# Altium PCB 2016_CARTE_MOFSET.PCBDOC
Units mil, origin at the board's own origin, x right, y up, seen from the top; angles counter-clockwise.
Board outline 2598.44 x 2322.82 mil, 4 copper layers (1-TOP, 2-SIGNAL, 3-GND, 4-BOTTOM); 62 components, 43 nets, 170 pads, 533 vias.
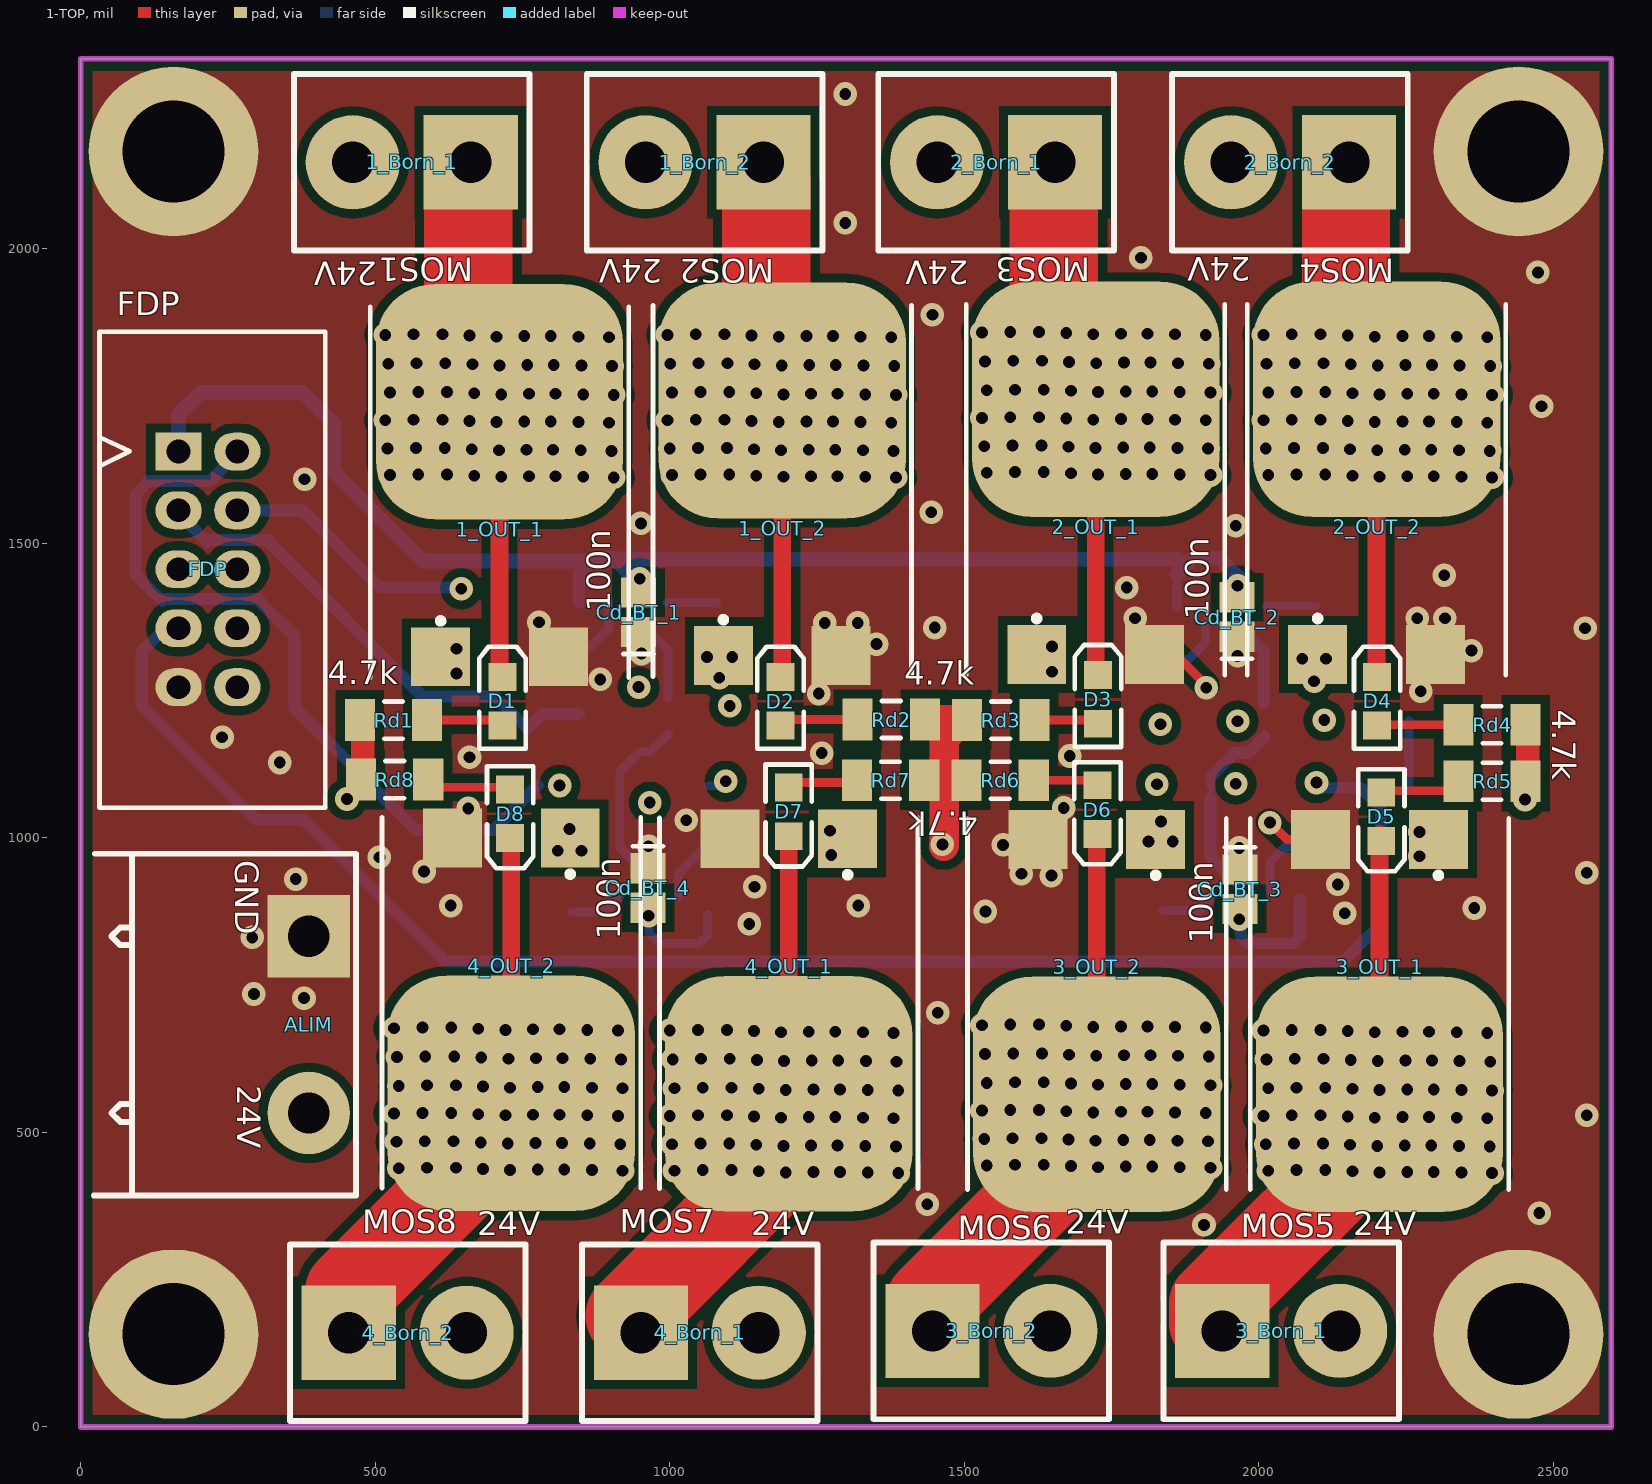
[diagram p0: 1-TOP view]
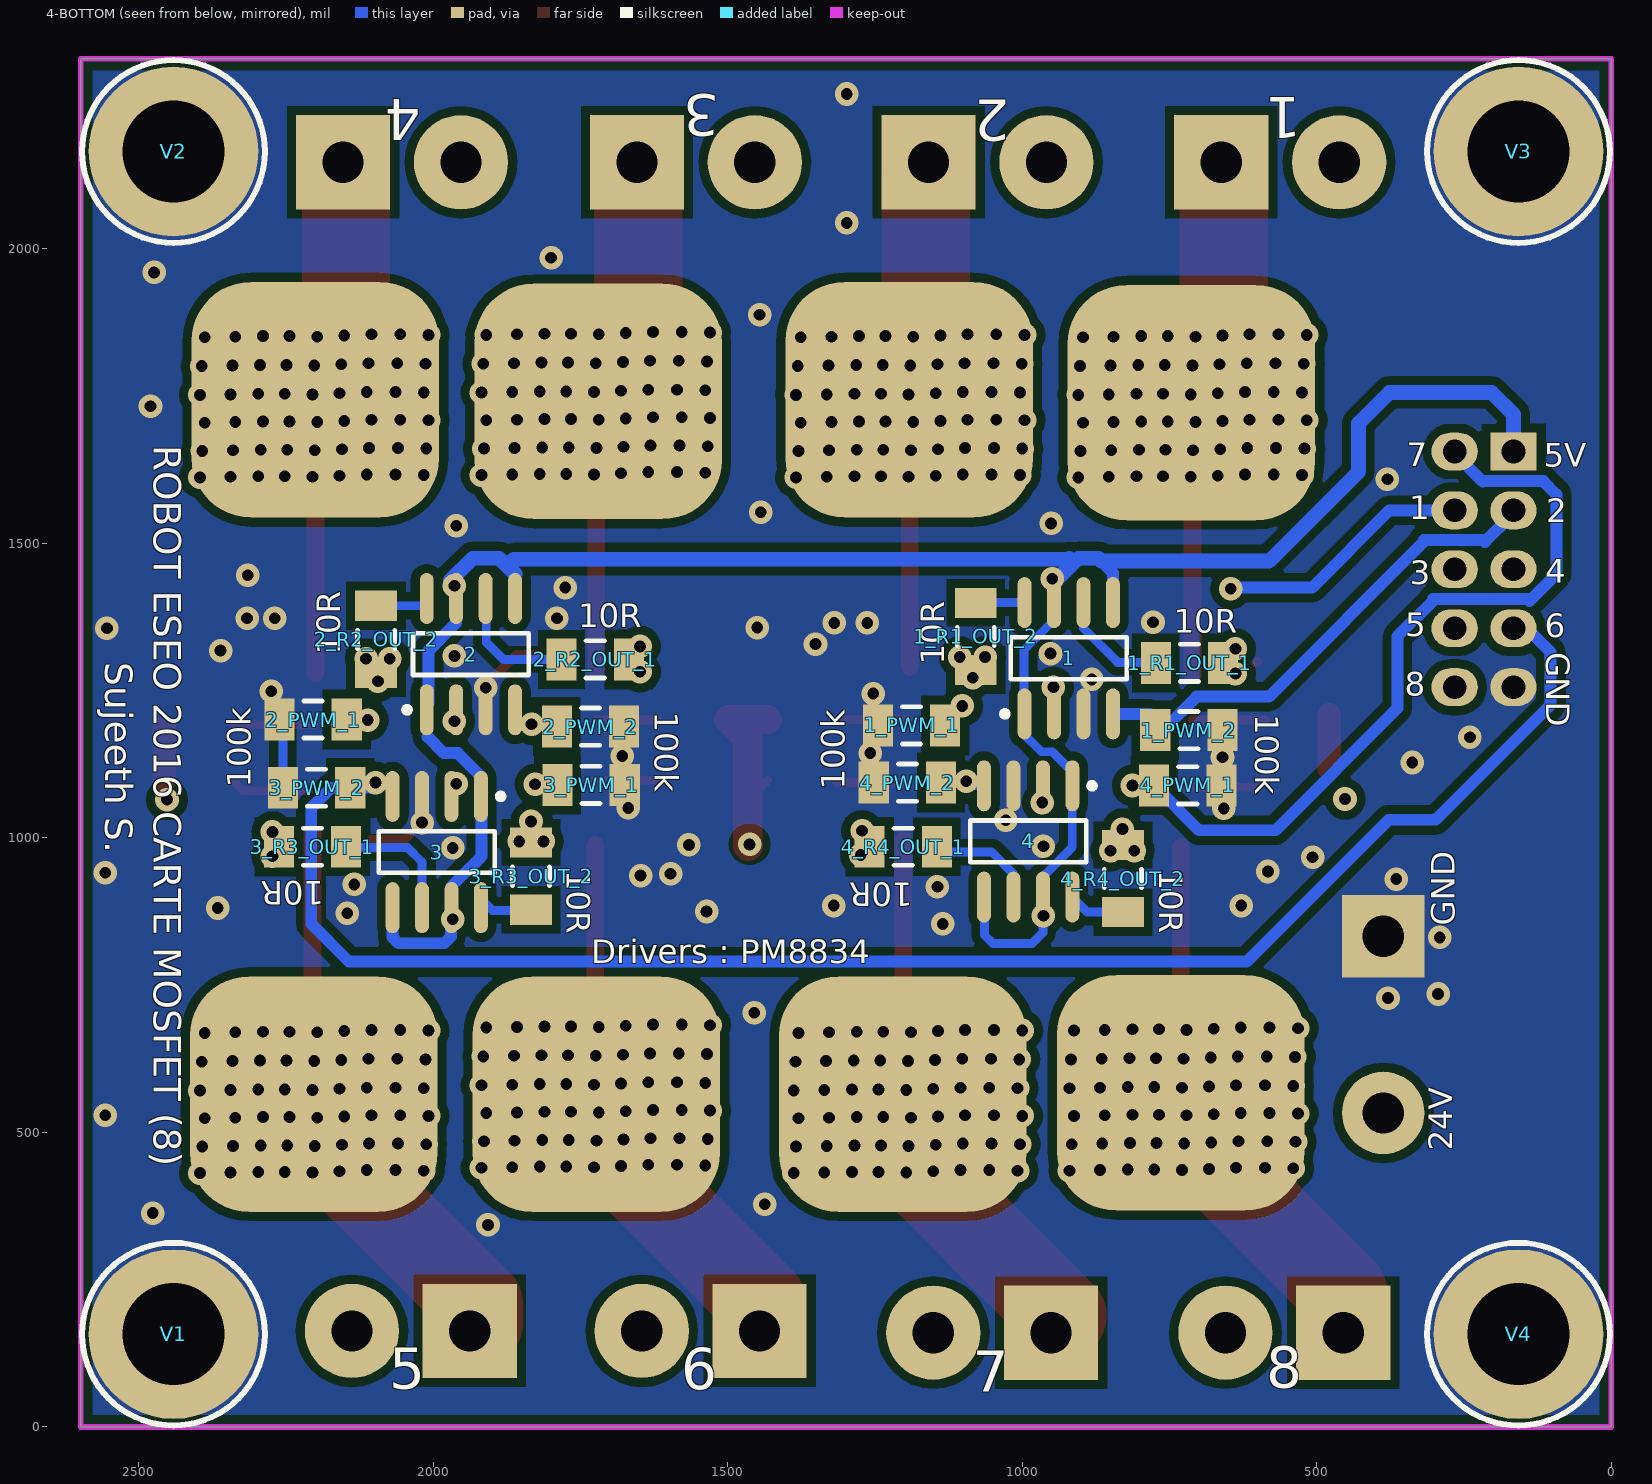
[diagram p1: 4-BOTTOM view, seen from below]
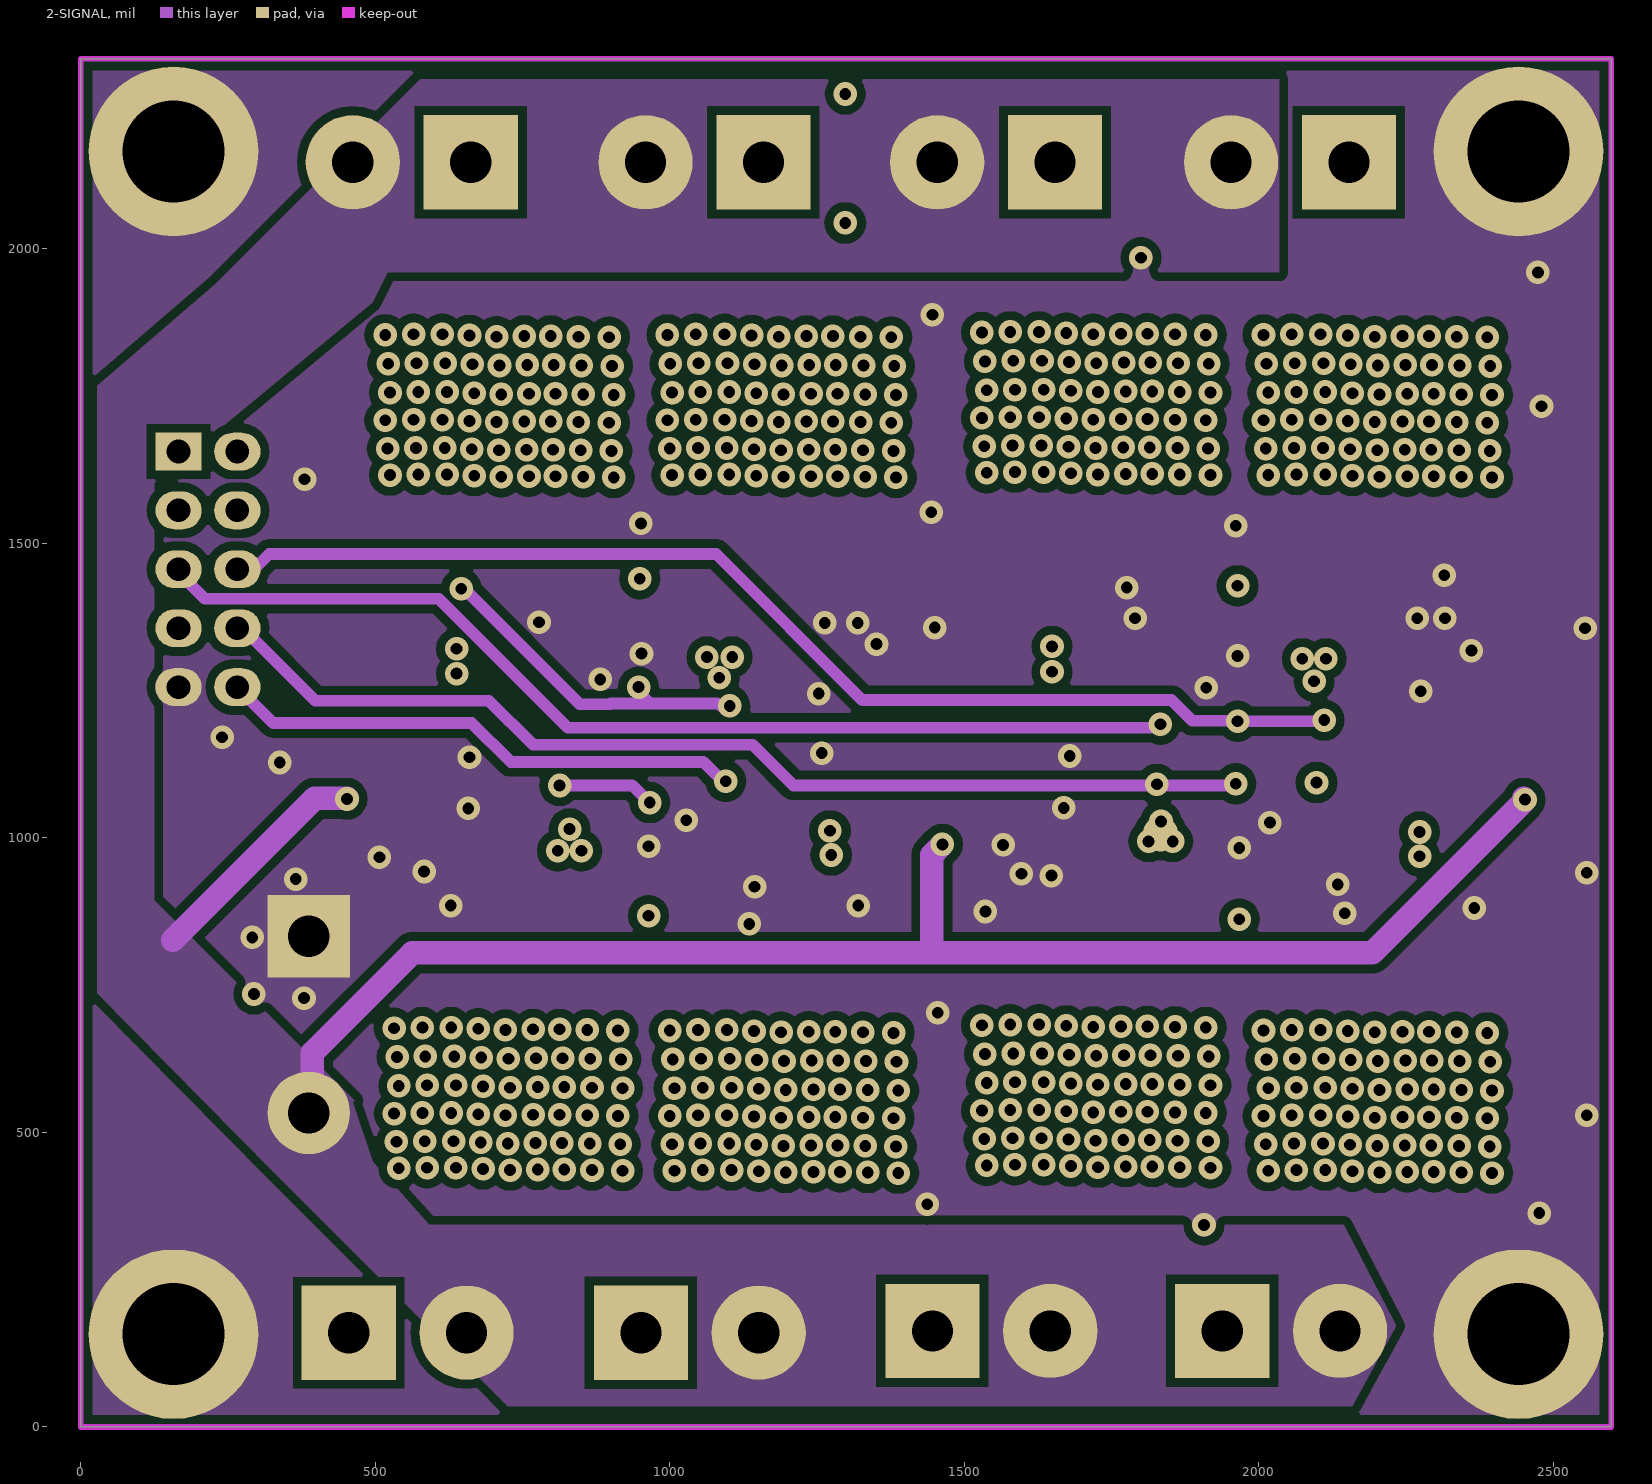
[diagram p2: 2-SIGNAL]
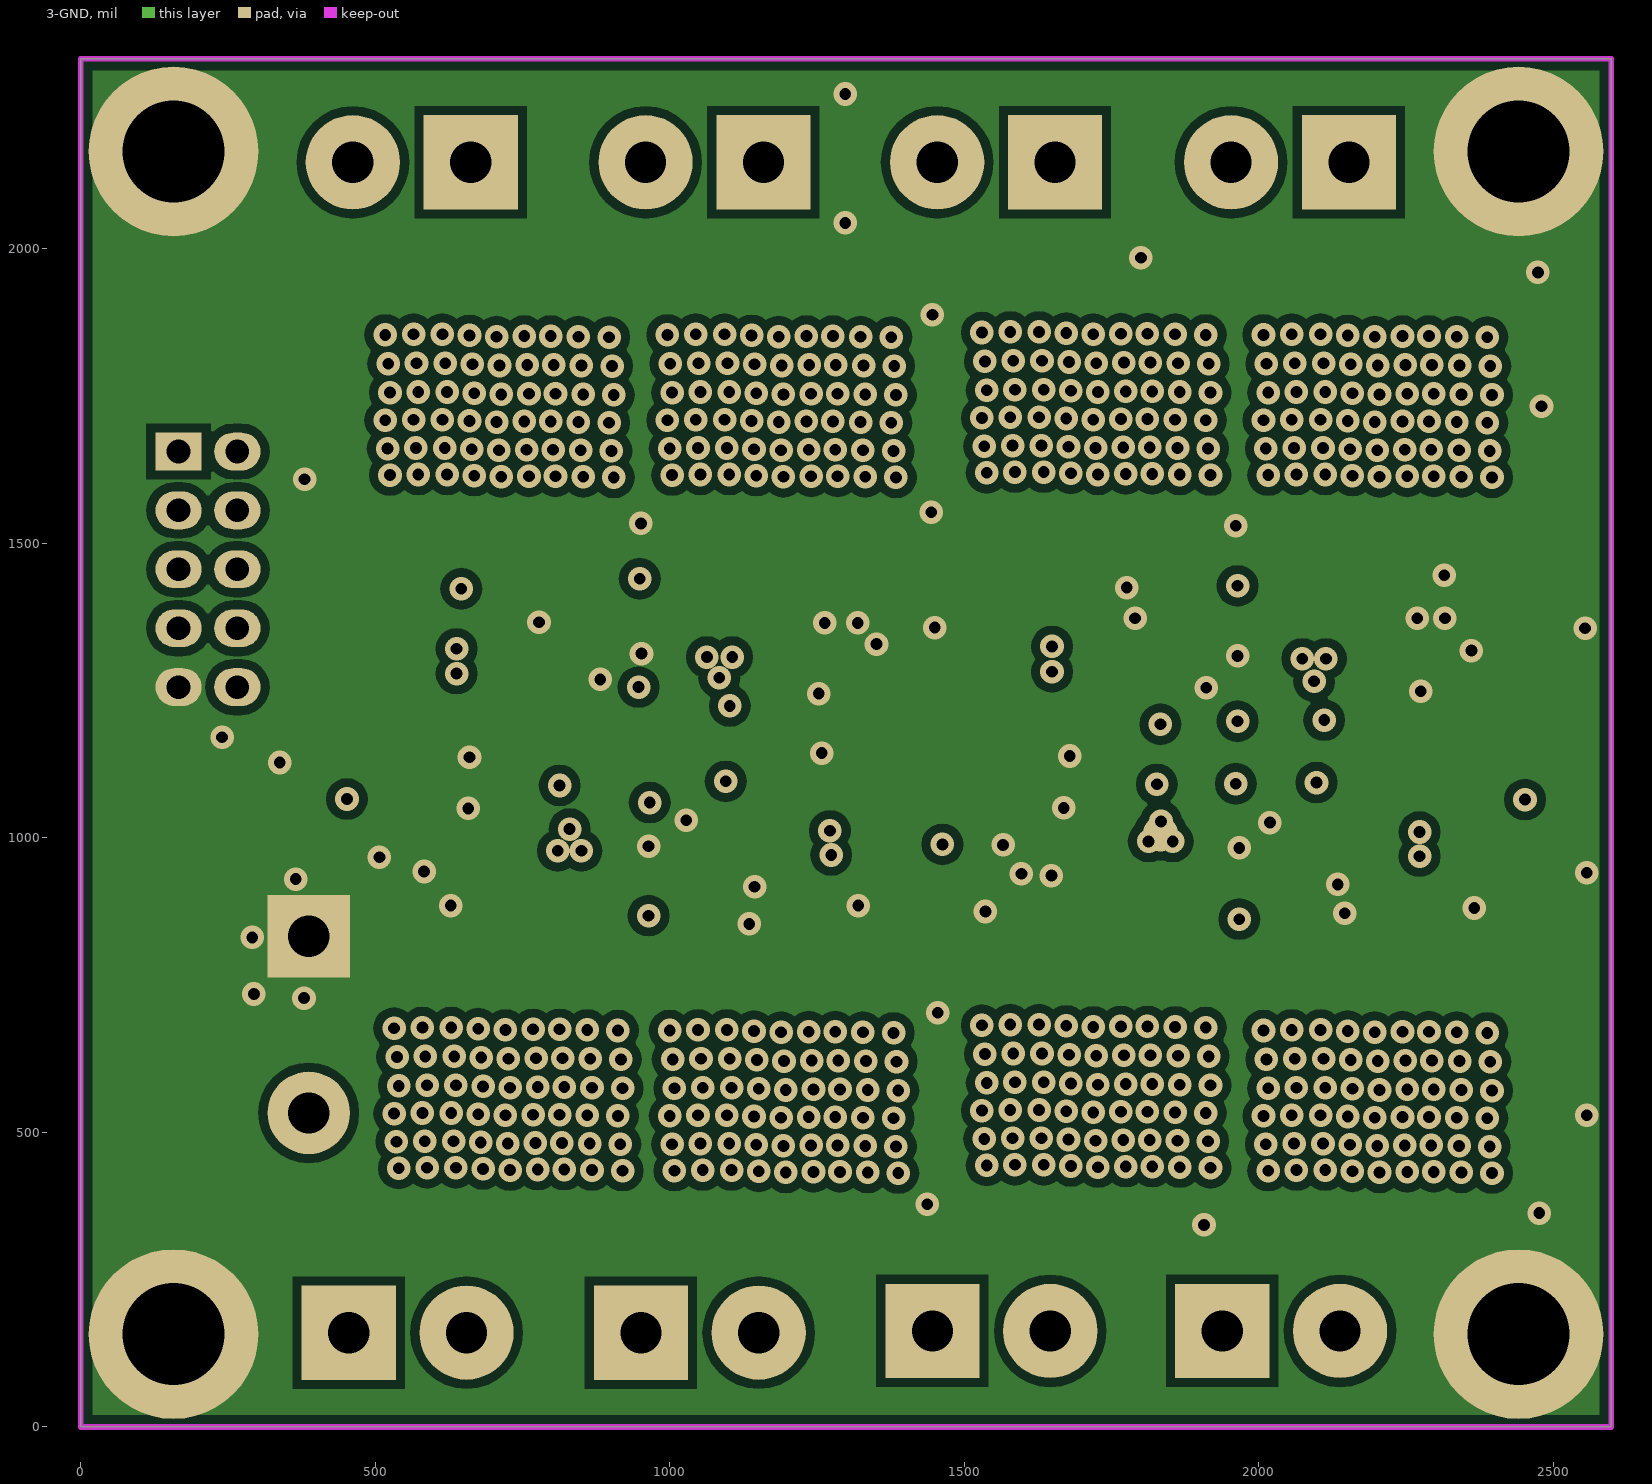
[diagram p3: 3-GND]
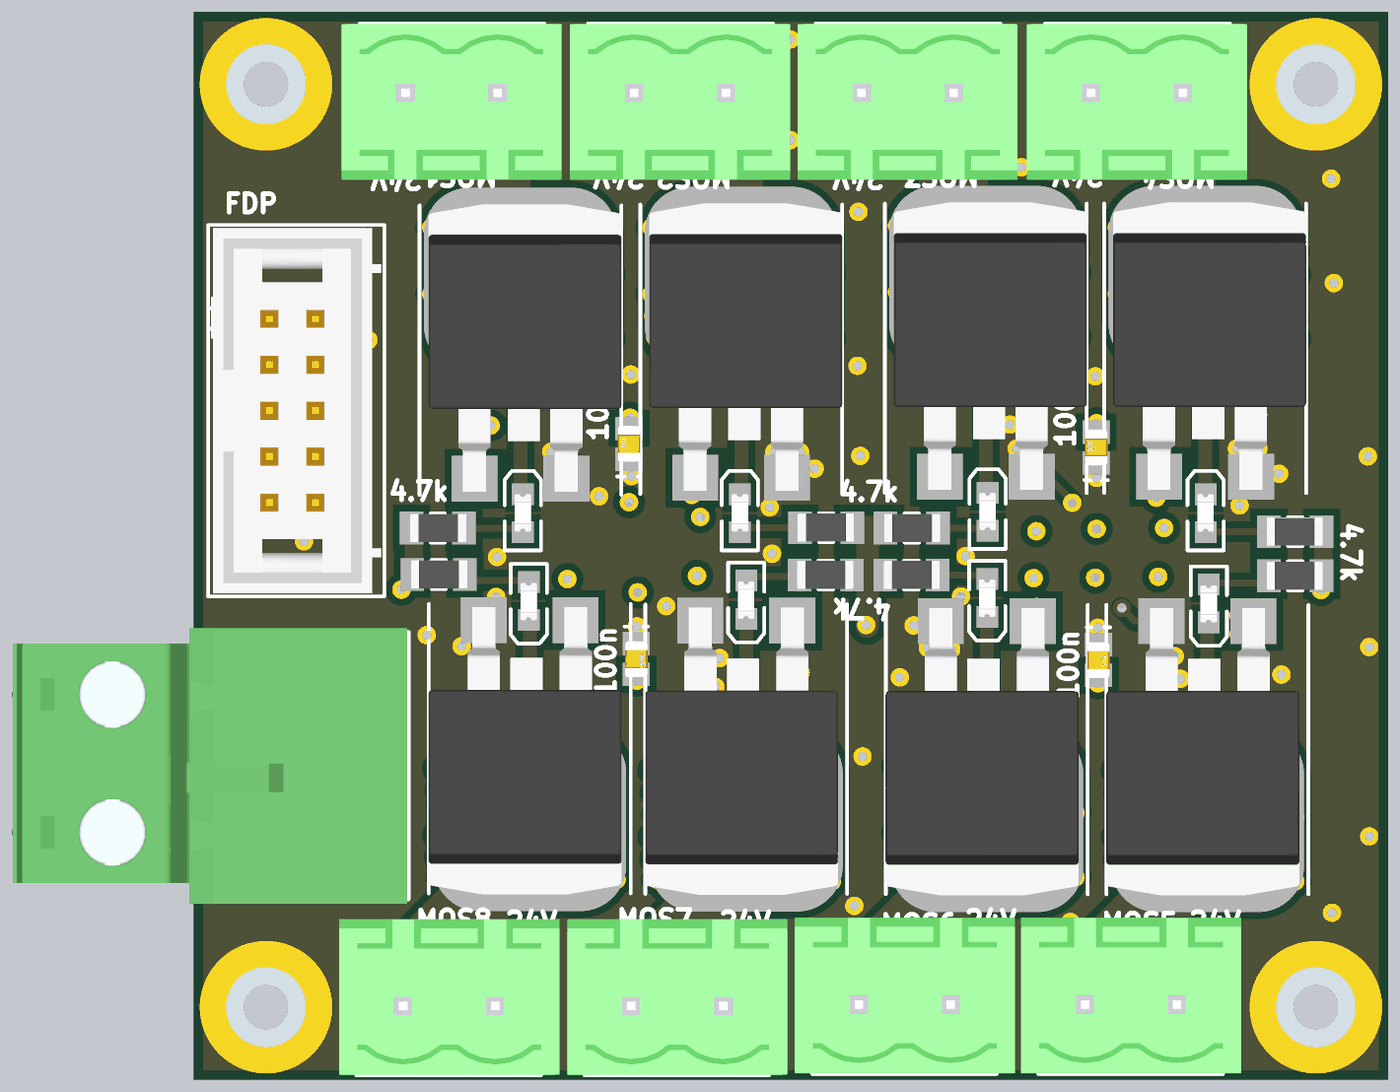
[diagram p4: 3D render of the assembled board from above, using the file's embedded part models]
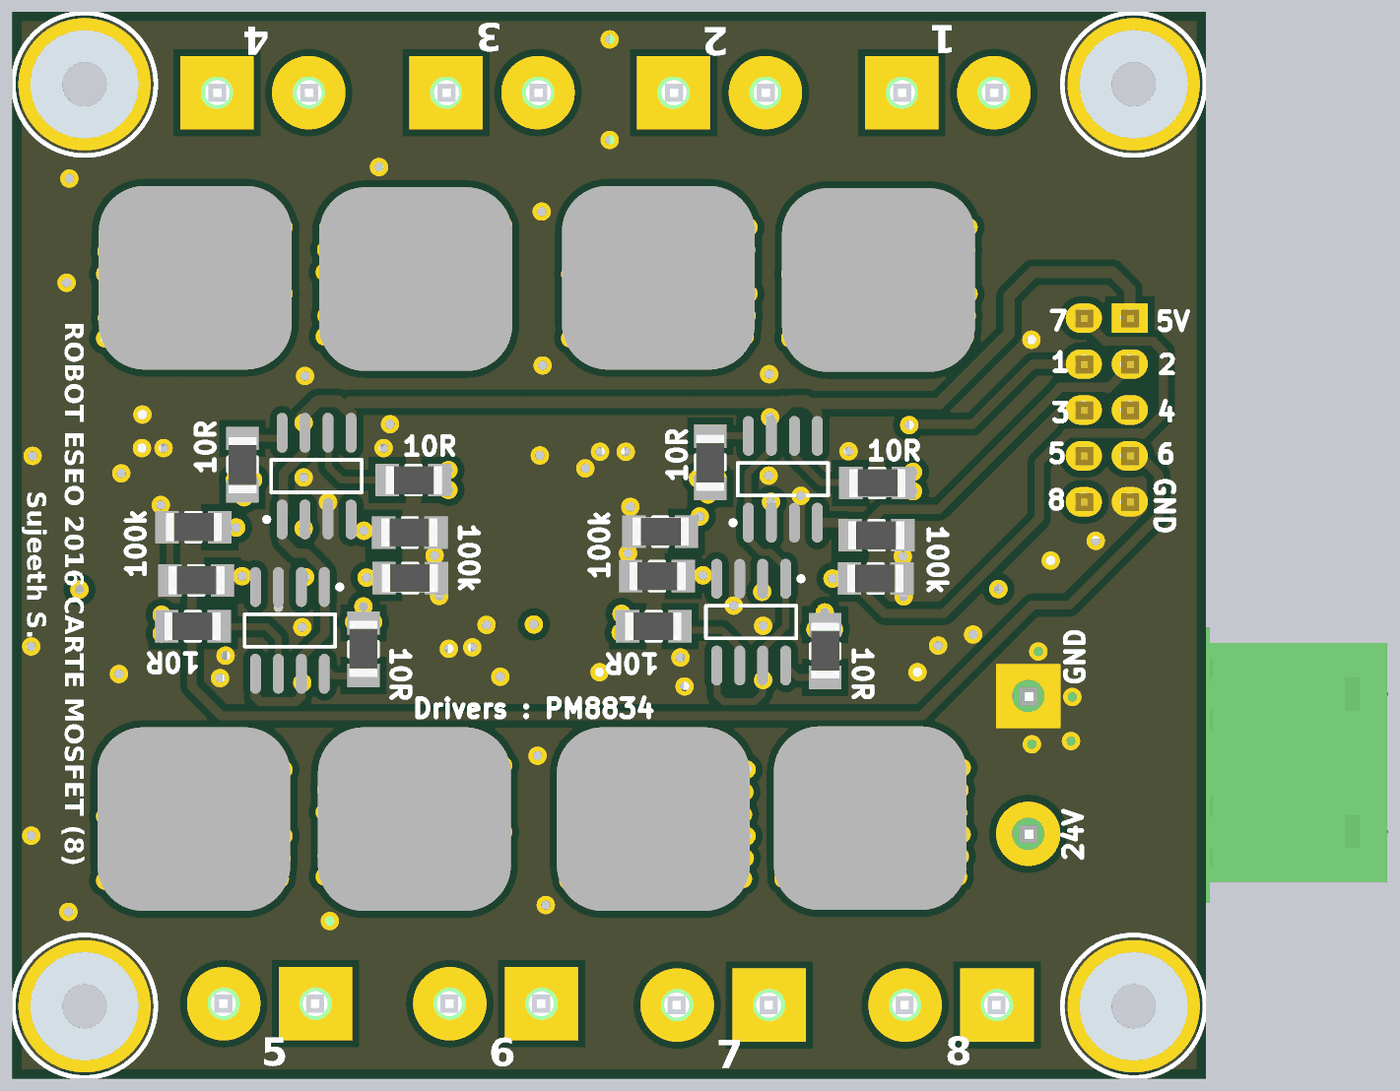
[diagram p5: 3D render of the assembled board from below, using the file's embedded part models]

## Layer stack, top to bottom
Top Solder: solder mask 0.4, Solder Resist, Dk 3.5
1-TOP: signal copper 1.4
Dielectric1: prepreg 12.6, FR-4, Dk 4.8
2-SIGNAL: signal copper 1.4
Dielectric2: core 12.6, FR-4, Dk 4.8
3-GND: signal copper 1.4
Dielectric3: prepreg 12.6, FR-4, Dk 4.8
4-BOTTOM: signal copper 1.4
Bottom Solder: solder mask 0.4, Solder Resist, Dk 3.5

## Board outline
-0.02,0.02 2598.43,0.02 2598.43,2322.83 -0.02,2322.83

## Design rules (kind name [scope] priority, off if disabled: settings)
Clearance Clearance_1 [InNamedPolygon('4-BOTTOM') Or  InNamedPolygon('2-SIGNAL') Or  InNamedPolygon('2-24V') Or  InNamedPolygon('3-TOP') Or  InNamedPolygon('3-GND')] p1: gap=15
Clearance [All] p2: gap=7
FabricationTestPointUsage TestPointUsage [All] p1: valid=0 allowmultiple=FALSE
FabricationTestpoint Testpoint [All] p1: side=3 testpointundercomponent=TRUE minsize=40 maxsize=100 preferedsize=60 minholesize=0 maxholesize=40 preferedholesize=32 testpointgrid=1 allowsidetop=TRUE allowsidebottom=TRUE usegrid=TRUE gridtolerance=0.01
PlaneClearance [All] p1: clearance=10
PlaneConnect [All] p1: planeconnectstyle=Direct reliefexpansion=25 reliefentries=4 reliefconductorwidth=12 reliefairgap=15
PolygonConnect [All] p1: connectstyle=Direct reliefconductorwidth=10 reliefentries=4 polygonreliefangle="90 Angle" airgapwidth=10
RoomDefinition 2016_CARTE_MOFSET [InComponentClass('2016_CARTE_MOFSET')] p1: confinementstyle=ConfineIn formatcopy=TRUE lockcomponents=FALSE outline 5560.14,3155.02 6797.14,3155.02 6797.14,3535.02 5560.14,3535.02
RoutingLayers RoutingLayers_1 [All] p1: top layer_v5=TRUE mid layer 1_v5=FALSE mid layer 2_v5=FALSE bottom layer_v5=TRUE
RoutingLayers [All] p2: top layer_v5=TRUE mid layer 1_v5=FALSE mid layer 2_v5=FALSE bottom layer_v5=TRUE
RoutingVias [All] p1: holewidth=28 width=50 viastyle="Through Hole" minholewidth=28 minwidth=50 maxholewidth=28 maxwidth=50
SilkToSolderMaskClearance SilkscreenOverComponentPads [IsPad] p1: minsilkscreentomaskgap=10 clearancetoexposedcopper=TRUE
SolderMaskExpansion [All] p1: expansion=0
Width [All] p1: maxlimit=300 minlimit=5 preferedwidth=20
23 further rules are at their usual default settings.

## Components (designator, comment, footprint, x,y, rotation, side; value= is the part's Value field where it differs from the comment)
1 "PM8834-1" SO8_N 920.98,1305.02 r90 bottom
1_Born_1 "BORNIER2" BORNIER2 461.98,2147.02 r0 top
1_Born_2 "BORNIER2" BORNIER2 958.98,2147.02 r0 top
1_OUT_1 "AUIRF1018ES" D2PAK_GROS_PAD 710.98,1524.02 r0 top
1_OUT_2 "AUIRF1018ES" D2PAK_GROS_PAD 1190.98,1526.02 r0 top
1_PWM_1 "100k_1%_75V" R1206_N 1187.98,1191.02 r180 bottom
1_PWM_2 "100k_1%_75V" R1206_N 716.98,1183.02 r0 bottom
1_R1_OUT_1 "10" R1206_N 715.98,1297.02 r180 bottom
1_R1_OUT_2 "10" R1206_N 1078.98,1342.02 r270 bottom
2 "PM8834-2" SO8_N 1935.98,1312.02 r90 bottom
2_Born_1 "BORNIER2" BORNIER2 1453.98,2147.02 r0 top
2_Born_2 "BORNIER2" BORNIER2 1952.98,2147.02 r0 top
2_OUT_1 "AUIRF1018ES" D2PAK_GROS_PAD 1722.98,1528.02 r0 top
2_OUT_2 "AUIRF1018ES" D2PAK_GROS_PAD 2199.98,1528.02 r0 top
2_PWM_1 "100k_1%_75V" R1206_N 2203.98,1201.02 r180 bottom
2_PWM_2 "100k_1%_75V" R1206_N 1732.98,1189.02 r0 bottom
2_R2_OUT_1 "10" R1206_N 1724.98,1303.02 r180 bottom
2_R2_OUT_2 "10" R1206_N 2096.98,1337.02 r270 bottom
3 "PM8834-3" SO8_N 1993.98,976.02 r270 bottom
3_Born_1 "BORNIER2" BORNIER2 2137.98,163.02 r180 top
3_Born_2 "BORNIER2" BORNIER2 1645.98,163.02 r180 top
3_OUT_1 "AUIRF1018ES" D2PAK_GROS_PAD 2204.98,781.02 r180 top
3_OUT_2 "AUIRF1018ES" D2PAK_GROS_PAD 1724.98,781.02 r180 top
3_PWM_1 "100k_1%_75V" R1206_N 1731.98,1090.02 r0 bottom
3_PWM_2 "100k_1%_75V" R1206_N 2197.98,1085.02 r180 bottom
3_R3_OUT_1 "10" R1206_N 2204.98,985.02 r0 bottom
3_R3_OUT_2 "10" R1206_N 1833.98,935.02 r90 bottom
4 "PM8834-4" SO8_N 989.98,994.02 r270 bottom
4_Born_1 "BORNIER2" BORNIER2 1150.98,160.02 r180 top
4_Born_2 "BORNIER2" BORNIER2 654.98,160.02 r180 top
4_OUT_1 "AUIRF1018ES" D2PAK_GROS_PAD 1201.98,782.02 r180 top
4_OUT_2 "AUIRF1018ES" D2PAK_GROS_PAD 730.98,783.02 r180 top
4_PWM_1 "100k_1%_75V" R1206_N 718.98,1089.02 r0 bottom
4_PWM_2 "100k_1%_75V" R1206_N 1194.98,1094.02 r180 bottom
4_R4_OUT_1 "10" R1206_N 1201.98,985.02 r0 bottom
4_R4_OUT_2 "10" R1206_N 828.98,931.02 r90 bottom
ALIM "0 - 24V" BORNIER2_FEM_COUDE 386.98,833.02 r270 top
Cd_BT_1 "100nF" C0805_N 946.98,1383.02 r90 top
Cd_BT_2 "100nF" C0805_N 1962.98,1375.02 r90 top
Cd_BT_3 "100nF" C0805_N 1967.98,913.02 r270 top
Cd_BT_4 "100nF" C0805_N 962.98,915.02 r270 top
D1 "LED" LED_0805 715.98,1232.02 r90 top
D2 "LED" LED_0805 1187.98,1232.02 r90 top
D3 "LED" LED_0805 1726.98,1235.02 r90 top
D4 "LED" LED_0805 2200.98,1232.02 r90 top
D5 "LED" LED_0805 2207.98,1036.02 r270 top
D6 "LED" LED_0805 1725.98,1048.02 r270 top
D7 "LED" LED_0805 1201.98,1044.02 r270 top
D8 "LED" LED_0805 728.98,1041.02 r270 top
FDP "HE10/10_MALE_DROIT_BAS_PROFIL" HE10/10_M_D_BP 266,1656 r270 top
Rd1 "4,7k" R1206_N 530.98,1200.02 r0 top
Rd2 "4,7k" R1206_N 1375.98,1201.02 r180 top
Rd3 "4,7k" R1206_N 1561.98,1200.02 r0 top
Rd4 "4,7k" R1206_N 2395.98,1192.02 r180 top
Rd5 "4,7k" R1206_N 2395.98,1096.02 r180 top
Rd6 "4,7k" R1206_N 1560.98,1098.02 r0 top
Rd7 "4,7k" R1206_N 1374.98,1098.02 r180 top
Rd8 "4,7k" R1206_N 532.98,1099.02 r0 top
V1 "Entretoise WURTH CMS" ENTRETOISE_CMS 2440.94,157.48 r180 bottom
V2 "Entretoise WURTH CMS" ENTRETOISE_CMS 2440.94,2165.35 r180 bottom
V3 "Entretoise WURTH CMS" ENTRETOISE_CMS 157.48,2165.35 r180 bottom
V4 "Entretoise WURTH CMS" ENTRETOISE_CMS 157.48,157.48 r180 bottom

## Footprints (in the part's own frame and the unit in brackets; to place one, negate y for a bottom-side part, rotate by r counter-clockwise, add the part's x,y. Pads: shape width x height; smd on the part's side, far side on the other; paste and mask are expansions set on the pad)
BORNIER2 [mil] "Connector; Header; 2 Position; screw terminal blocks, Pin Spacing=5.08mm"
  rect 160x160 hole 70: 1(200,0)
  round 160 hole 70: 2(0,0)
  silkscreen extent -100,-150 300,150, body extent -140,-189 338,150, height 472
BORNIER2_FEM_COUDE [mil] "Connector; Header; 2 Position; Right Angle; Female; Pin Spacing=5.08mm Green"
  rect 140x140 hole 70: 1(0,0)
  round 140 hole 70: 2(300,0)
  silkscreen extent -140,-365 440,80, body extent -149,-783 451,77, height 598
C0805_N [mm] "Chip Capacitor, Body 2.0x1.3mm, IPC Medium Density"
  rect 1.3x1.5 smd: 1(-0.85,0) 2(0.85,0)
  silkscreen extent -1.8,-0.65 -1.8,0.65, body extent -0.99,-0.63 1.01,0.63, height 0.8
D2PAK_GROS_PAD [mm] "D2-PAK/TO-263-AB; 3 Leads (1 Cropped); Body 15.5 (inc. leads) x 10.5 mm (LxW max)"
  rect 2.54x2.54 smd: 1(-2.54,-5.5) 3(2.54,-5.5)
  rrect50% 10.668x10.16 smd: 2(0,5.5)
  silkscreen extent -5.58,-6.4 5.58,9.6, body extent -5.08,-6.22 5.59,9.66, height 4.83
ENTRETOISE_CMS [mil] "Entretoise CMS Wurth trou 4.4mm"
  round 288 hole 173.23: 1(0,0)
  silkscreen extent -155,-155 155,155, body extent -118,-118 118,117, height 118
HE10/10_M_D_BP [mm] "HE10 ; 10 CONTACTS ; MALE ;  DROIT; BAS PROFIL ; ESPACEMENTS BROCHES = 2.54 mm"
  rect 1.63x2 hole 1.016: 1(0,-2.54)
  oval 1.63x2 hole 1.016: 2(0,0) 3(2.54,-2.54) 4(2.54,0) 5(5.08,-2.54) 6(5.08,0) 7(7.62,-2.54) 8(7.62,0) 9(10.16,-2.54) 10(10.16,0)
  silkscreen extent -5.16,-5.95 15.36,3.78, body extent -5,-5.8 15.2,3.6, height 8.8
LED_0805 [mm] "SM LED; 2 Flat Leads"
  rect 1.2x1.2 smd: 1(-1.05,0) 2(1.05,0)
  silkscreen extent -2.05,-1 2.35,1, body extent -1.05,-0.64 1.06,0.64, height 1.2
R1206_N [mm] "Chip Resistor, Body 3.2x1.6mm, IPC Medium Density"
  rect 1.3x1.8 smd: 1(-1.45,0) 2(1.45,0)
  silkscreen extent -0.4,-0.8 0.4,0.8, body extent -1.68,-0.87 1.68,0.87, height 0.71
SO8_N [mm] "SOIC, 8-Leads, Body 4.9x3.9mm, Pitch 1.27mm, IPC Medium Density"
  oval 2.2x0.6 smd: 1(-2.4,1.905) 2(-2.4,0.635) 3(-2.4,-0.635) 4(-2.4,-1.905) 5(2.4,-1.905) 6(2.4,-0.635) 7(2.4,0.635) 8(2.4,1.905)
  silkscreen extent -2.52,-2.5 0.9,2.88, body extent -1.95,-2.45 1.95,2.45, height 1.75

## Part data
1 2 3 4: library part PM8834, "4 A dual low-side MOSFET driver"
1_Born_1 1_Born_2 2_Born_1 2_Born_2 3_Born_1 3_Born_2 4_Born_1 4_Born_2: "Terminal blocks, 2 pins, pitch=5mm"
1_OUT_1 1_OUT_2 2_OUT_1 2_OUT_2 3_OUT_1 3_OUT_2 4_OUT_1 4_OUT_2: library part IRF1010S, "HEXFET N-Channel Power MOSFET"
1_PWM_1 1_PWM_2 1_R1_OUT_1 1_R1_OUT_2 2_PWM_1 2_PWM_2 2_R2_OUT_1 2_R2_OUT_2 3_PWM_1 3_PWM_2 3_R3_OUT_1 3_R3_OUT_2 4_PWM_1 4_PWM_2 4_R4_OUT_1 4_R4_OUT_2 Rd1 Rd2 Rd3 Rd4 Rd5 Rd6 Rd7 Rd8: library part Resistor, "Resistor"
ALIM: library part BORNIER2, "Terminal blocks, 2 pins, pitch=5mm"
Cd_BT_1 Cd_BT_2 Cd_BT_3 Cd_BT_4: library part Condensateur, "Capacitor"
D1 D2 D3 D4 D5 D6 D7 D8: "Typical LED"
FDP: "EMBASE HE10/10 MALE DROIT BAS PROFIL"
V1 V2 V3 V4: "Entretoise Wurth"

## Free pads (board coordinates)
  round 60 on Mid1: 0(1833,1007)
  round 60 on Mid2: 0(1833,1007)
  rrect50% 420x400 smd far side: 2(712.98,1739.02) 2(730.98,567.02) 2(1191.98,1744.02) 2(1202.98,565.02) 2(1719.98,1741.02) 2(1722.98,565.02) 2(2199.98,1744.02) 2(2202.98,565.02)

## Via types
v1: diameter 40, hole 20, 1-TOP to 4-BOTTOM, 533 vias

## Nets (pads, with @x,y where several pads share a name; then routed paths per layer and width w, separated by ;. In a path a pad name is that pad's centre, name@x,y a point inside that pad or via, vN(x,y) a via of type N, cw(c..) or ccw(c..) an arc to the next point about the centre after c; other vN are vias at no path point)
5V: 1.1 1.5 1.7 2.1 2.5 2.7 3.1 3.5 3.7 4.1 4.5 4.7 Cd_BT_1.2 Cd_BT_2.2 Cd_BT_3.2 Cd_BT_4.2 FDP.1 | length 3713
  4-BOTTOM w15: FDP.1@165.98,1654.02 FDP.1 ; 904.98,1475.02 919.98,1475.02 ; 1.7 945.98,1370.02 996.98,1319.02 1.1@996.98,1238.02 ; 4.7@962.98,936.02 914.98,984.02 4.1 914.98,1112.02 949.28,1146.31 967.28,1146.31 1.1@997.98,1177.02 ; 4.7 964.98,839.02 982.98,821.02 1049.98,821.02 1063.98,835.02 4.5@1063.98,870.02 ; 2.5@1860.98,1391.5 2.5@1860.98,1448.02 ; 3.1@1918.98,1085.5 3.1@1918.98,1105.02 ; 2.7@1960.98,1365.02 2.7@1960.98,1391.5 ; 3.7@1968.98,896.53 3.7@1968.98,918.02
  4-BOTTOM w20: 1.5 845.98,1450.02 865.98,1470.02 865.98,1471.02 869.98,1475.02 ; 3.1@1917.98,1069.02 1917.98,969.02 3.7@1968.98,918.02 ; 3.1@1918.98,1105.02 1957.98,1144.02 1981.98,1144.02 2009.48,1171.52 ; 2.7@1960.98,1365.02 2007.98,1318.02 2.1@2007.98,1229.02 ; 3.7@1969.98,885.02 1969.98,832.02 1980.98,821.02 2058.98,821.02 2068.98,831.02 3.5@2068.98,896.53
  4-BOTTOM w25: FDP.1 165.98,1719.02 202.98,1756.02 376.98,1756.02 428.98,1704.02 428.98,1622.02 580.98,1470.02 865.98,1470.02 ; 869.98,1475.02 904.98,1475.02 v1@934.48,1445.52 ; 919.98,1475.02 921.98,1473.02 1862.98,1473.02 1874.48,1461.52 ; 2.5@1860.98,1448.02 1887.98,1475.02 1932.98,1475.02 2.7@1970.98,1437.02
  other v1: 1966.98,862.02 963.98,868.02 1963.98,1428.02 948.98,1440.02
24V: 1_Born_1.2 1_Born_2.2 2_Born_1.2 2_Born_2.2 3_Born_1.2 3_Born_2.2 4_Born_1.2 4_Born_2.2 ALIM.2 Rd1.1 Rd2.1 Rd3.1 Rd4.1 Rd5.1 Rd6.1 Rd7.1 Rd8.1 | length 3402.2
  1-TOP w15: Rd8.1@478.98,1118.02 Rd8.1@483.98,1113.02 ; Rd7.1 Rd7.1@1439.07,1091.02 ; Rd7.1@1438.98,1091.02 Rd7.1@1443.98,1086.02 ; Rd4.1 Rd4.1@2456.98,1188.1
  1-TOP w40: Rd8.1@478.98,1118.02 Rd1.1@478.98,1209.02 ; Rd5.1@2456.98,1098.02 Rd4.1@2456.98,1188.1
  1-TOP w50: Rd2.1 1497.98,1201.02 1465.98,1169.02 1465.98,987.02 v1@1464.98,986.02
  2-SIGNAL w40: 155.98,826.02 396.98,1067.02 v1@451.98,1067.02 ; ALIM.2@392.98,559.02 392.98,635.02 562.98,805.02 1444.98,805.02 ; v1@1459.98,986.02 1444.98,971.02 1444.98,805.02 ; v1@2449.98,1067.02 2449.98,1062.02 2192.98,805.02 1444.98,805.02
  other v1: 1462.98,989.02 2451.98,1065.02 451.98,1066.02
GND: 1.3 1_OUT_1.3 1_OUT_2.3 1_PWM_1.1 1_PWM_2.1 2.3 2_OUT_1.3 2_OUT_2.3 2_PWM_1.1 2_PWM_2.1 3.3 3_OUT_1.3 3_OUT_2.3 3_PWM_1.1 3_PWM_2.1 4.3 4_OUT_1.3 4_OUT_2.3 4_PWM_1.1 4_PWM_2.1 ALIM.1 Cd_BT_1.1 Cd_BT_2.1 Cd_BT_3.1 Cd_BT_4.1 FDP.9 V1.1 V2.1 V3.1 V4.1 | length 357
  1-TOP w15: ALIM.1@352.98,833.02 ALIM.1 ; 2_OUT_1.3 1858.52,1311.48 v1@1910.98,1259.02 ; v1@2017.98,1027.02 v1(2018.98,1026.02) 2047.45,997.55 3_OUT_1.3
  4-BOTTOM w15: 3_PWM_2.1 2_PWM_1.1@2255.07,1199.1
  other v1: 1907,343 2475.98,363.02 1437,378 2556.98,529.02 1454.98,703.02 378.98,728.02 293.98,735.02 290.98,831.02 1134.98,854.02 2145.98,872.02 1535.98,875.02 2365.98,881.02 627.98,885.02 1319.98,885.02 1143.98,917.02 2133.98,921.02 364.98,930.02 1647.98,936.02 1596.98,939.02 2556.98,941.02 582.98,943.02 506.98,967.02 1966.98,983.02 963.98,986.02 1565.98,988.02 1027.98,1030.02 657.98,1050.02 1668.98,1051.02 337.98,1128.02 659.98,1137.02 1678.98,1139.02 1257.98,1144.02 239.98,1171.02 1252.98,1245.02 2274.98,1249.02 1910.98,1255.02 881.98,1269.02 1963.98,1309.02 951.98,1313.02 2360.98,1318.02 1350.98,1329.02 2553.98,1356.02 1449.98,1357.02 1262.98,1365.02 1318.98,1365.02 777.98,1366.02 1789.98,1373.02 2268.98,1373.02 2315.98,1373.02 1775.98,1425.02 2314.98,1446.02 1960.98,1530.02 950.98,1534.02 1443.98,1553.02 380,1609 2479.98,1733.02 1445.98,1888.02 2473.98,1960.02 1799.98,1985.02 1297.98,2044.02 1297.98,2263.02
MOSFET_1: 1.2 1_PWM_1.2 FDP.4 | length 983.5
  2-SIGNAL w15: 1079.98,1228.02 v1@1092.98,1215.02
  2-SIGNAL w20: v1@650.98,1423.02 846.98,1227.02 899.38,1227.02 900.38,1228.02 962.98,1228.02 ; v1@947.98,1247.02 962.98,1232.02 962.98,1228.02 ; 1079.98,1228.02 962.98,1228.02
  4-BOTTOM w20: FDP.4 376.98,1556.02 507.98,1425.02 v1@640.98,1425.02
  other v1: 1101.98,1224.02 946.98,1256.02 645.98,1423.02
MOSFET_2: 1.4 1_PWM_2.2 FDP.3 | length 821.2
  4-BOTTOM w20: FDP.3@170.98,1546.02 214.4,1502.6 ; 214.4,1505.6 318.4,1505.6 ; 318.4,1502.6 580.98,1240.02 703.98,1240.02 1_PWM_2.2@758.48,1185.52 ; 1_PWM_2.2@767.98,1195.02 783.5,1210.53 1.4
MOSFET_3: 2.2 2_PWM_1.2 FDP.6 | length 1950.5
  2-SIGNAL w15: v1@1970.98,1199.02 v1@1971.98,1198.02
  2-SIGNAL w20: FDP.6@288.98,1451.02 319.98,1482.02 1078.98,1482.02 1326.98,1234.02 1851.98,1234.02 1886.98,1199.02 v1@1970.98,1199.02 ; v1@1971.98,1198.02 v1@2108.98,1198.02
  other v1: 1963.98,1198.02 2110.98,1200.02
MOSFET_4: 2.4 2_PWM_2.2 FDP.5 | length 1800.6
  2-SIGNAL w15: v1@1832.98,1187.02 v1@1837.98,1192.02
  2-SIGNAL w20: FDP.5@171.82,1445.02 210.83,1406 608,1406 826.98,1187.02 v1@1832.98,1187.02
  4-BOTTOM w15: FDP.5@165.98,1443.02 FDP.5 FDP.5@171.82,1445.02
  other v1: 1832.98,1193.02
MOSFET_5: 3.2 3_PWM_1.2 FDP.8 | length 1799.6
  2-SIGNAL w15: FDP.8 FDP.8@274.98,1356.02
  2-SIGNAL w20: FDP.8@274.98,1356.02 397.98,1233.02 692.98,1233.02 767.98,1158.02 1140.98,1158.02 1209.98,1089.02 v1@1954.98,1089.02
  other v1: 1826.98,1091.02 1960.98,1092.02
MOSFET_6: 3.4 3_PWM_2.2 FDP.7 | length 2780.5
  2-SIGNAL w15: FDP.7@157.98,1349.02 FDP.7@159.98,1347.02
  4-BOTTOM w15: v1(2097.98,1094.02) v1@2106.98,1085.02
  4-BOTTOM w20: FDP.7@140.98,1353.02 102.98,1315.02 102.98,1226.02 298,1031 378,1031 618.98,790.02 2142.98,790.02 2206.98,854.02 2206.98,1051.02 2172.98,1085.02 v1@2106.98,1085.02
MOSFET_7: 4.2 4_PWM_1.2 FDP.2 | length 1466.4
  2-SIGNAL w20: v1(812.98,1089.02) 935.98,1089.02 v1@963.98,1061.02
  4-BOTTOM w15: 138.82,1402.02 139.4,1402.6
  4-BOTTOM w20: 114.98,1605.02 92.98,1583.02 92.98,1447.85 138.82,1402.02 ; 114.98,1606.02 217.98,1606.02 ; 139.4,1405.6 302.4,1405.6 ; 217.98,1605.02 FDP.2@265.98,1653.02 ; 302.4,1402.6 362.98,1342.02 362.98,1220.02 569.98,1013.02 700.07,1013.02 4_PWM_1.2
  other v1: 965.98,1060.02
MOSFET_8: 4.4 4_PWM_2.2 FDP.10 | length 922.2
  2-SIGNAL w20: FDP.10 326.98,1195.02 663.98,1195.02 729.98,1129.02 1056.98,1129.02 v1@1090.98,1095.02
  4-BOTTOM w15: 4.4 v1@1095.47,1088.5
  other v1: 1094.98,1096.02
Net1_6: 1.6 1_R1_OUT_1.1 | length 180.5
  4-BOTTOM w15: 1_R1_OUT_1.1@782.98,1298.02 837.98,1298.02 895.98,1356.02 1.6
Net1_8: 1.8 1_R1_OUT_2.1 | length 84.6
  4-BOTTOM w15: 1.8 1078.5,1399.5 1_R1_OUT_2.1@1079.98,1398.02
Net1_OUT_1_1: 1_OUT_1.1 1_R1_OUT_1.2 | length 4.2
  1-TOP w15: 1_OUT_1.1@599.98,1300.02 1_OUT_1.1@602.98,1297.02
  other v1: 637.98,1279.02 637.98,1321.02
Net1_OUT_2_1: 1_OUT_2.1 1_R1_OUT_2.2
  other v1: 1083.98,1272.02 1062.98,1307.02 1105.98,1307.02
Net2_6: 2.6 2_R2_OUT_1.1 | length 173.9
  4-BOTTOM w15: 2_R2_OUT_1.1 1880.98,1303.02 1909.98,1332.02 2.6@1909.98,1366.02
Net2_8: 2.8 2_R2_OUT_2.1 | length 83.9
  4-BOTTOM w15: 2.8@2013.07,1394.1 2_R2_OUT_2.1
Net2_OUT_1_1: 2_OUT_1.1 2_R2_OUT_1.2
  other v1: 1648.98,1282.02 1648.98,1325.02
Net2_OUT_2_1: 2_OUT_2.1 2_R2_OUT_2.2
  other v1: 2093.98,1266.02 2073.98,1304.02 2113.98,1304.02
Net3_6: 3.6 3_R3_OUT_1.1 | length 188.7
  4-BOTTOM w15: 3.6@2018.98,910.02 2018.98,959.02 2043.48,983.52 2146.4,983.52 3_R3_OUT_1.1
Net3_8: 3.8 3_R3_OUT_2.1 | length 90.1
  4-BOTTOM w15: 3_R3_OUT_2.1@1836.98,877.02 1899.47,877.02 3.8@1918.98,896.53
Net3_OUT_1_1: 3_OUT_1.1 3_R3_OUT_1.2
  other v1: 2272.98,969.02 2272.98,1010.02
Net3_OUT_2_1: 3_OUT_2.1 3_R3_OUT_2.2 pad.0
  other v1: 1812.98,994.02 1853.98,994.02 1833.98,1028.02
Net4_6: 4.6 4_R4_OUT_1.1 | length 180.8
  4-BOTTOM w15: 4.6 1014.98,939.02 1051.98,976.02 4_R4_OUT_1.1@1140.98,976.02
Net4_8: 4.8 4_R4_OUT_2.1 | length 91.6
  4-BOTTOM w15: 4_R4_OUT_2.1@833.98,874.02 889.47,874.02 4.8
Net4_OUT_1_1: 4_OUT_1.1 4_R4_OUT_1.2
  other v1: 1273.98,971.02 1271.98,1012.02
Net4_OUT_2_1: 4_OUT_2.1 4_R4_OUT_2.2
  other v1: 809.98,978.02 849.98,978.02 829.98,1015.02
NetD1_1: D1.1 Rd1.2 | length 121.9
  1-TOP w15: Rd1.2 D1.1@709.98,1200.02
NetD2_1: D2.1 Rd2.2 | length 123.9
  1-TOP w15: D2.1@1194.98,1201.02 Rd2.2
NetD3_1: D3.1 Rd3.2 | length 103.9
  1-TOP w15: Rd3.2 D3.1@1722.98,1200.02
NetD4_1: D4.1 Rd4.2 | length 135.9
  1-TOP w15: D4.1@2202.98,1192.02 Rd4.2
NetD5_1: D5.1 Rd5.2 | length 134.5
  1-TOP w15: D5.1@2210.98,1080.02 2322.9,1080.02 Rd5.2
NetD6_1: D6.1 Rd6.2 | length 107.9
  1-TOP w15: Rd6.2 D6.1@1725.98,1098.02
NetD7_1: D7.1 Rd7.2 | length 121.6
  1-TOP w15: D7.1@1197.98,1094.02 1313.9,1094.02 Rd7.2
NetD8_1: D8.1 Rd8.2 | length 147.3
  1-TOP w15: Rd8.2 603.07,1086.02 D8.1@731.98,1086.02
OUT1: 1_Born_1.1 1_OUT_1.2 D1.2 pad.2@712.98,1739.02 | length 824.4
  1-TOP w15: 1_Born_1.1 1_Born_1.1@695.98,2147.02
  1-TOP w30: D1.2@710.98,1276.02 1_OUT_1.2
  1-TOP w150: 1_Born_1.1@658,2127 658,1893 1_OUT_1.2@722.98,1828.02
  other v1: 904.98,1612.02 713.98,1613.02 852.98,1613.02 760.98,1614.02 805.98,1614.02 667.98,1615.02 524.98,1616.02 572.98,1617.02 621.98,1617.02 900.98,1657.02 709.98,1658.02 848.98,1658.02 756.98,1659.02 801.98,1659.02 663.98,1660.02 520.98,1661.02 568.98,1662.02 617.98,1662.02 896.98,1705.02 705.98,1706.02 844.98,1706.02 752.98,1707.02 797.98,1707.02 659.98,1708.02 516.98,1709.02 564.98,1710.02 613.98,1710.02 904.98,1752.02 713.98,1753.02 852.98,1753.02 760.98,1754.02 805.98,1754.02 667.98,1755.02 524.98,1756.02 572.98,1757.02 621.98,1757.02 901.98,1801.02 710.98,1802.02 849.98,1802.02 757.98,1803.02 802.98,1803.02 664.98,1804.02 521.98,1805.02 569.98,1806.02 618.98,1806.02 896.98,1850.02 705.98,1851.02 844.98,1851.02 752.98,1852.02 797.98,1852.02 659.98,1853.02 516.98,1854.02 564.98,1855.02 613.98,1855.02
OUT2: 1_Born_2.1 1_OUT_2.2 D2.2 pad.2@1191.98,1744.02 | length 789.6
  1-TOP w15: 1_Born_2.1@1156.98,2159.02 1_Born_2.1@1172.98,2175.02 ; 1_Born_2.1@1172.98,2162.02 1_Born_2.1@1172.98,2175.02 ; 1_Born_2.1@1172.98,2184.02 1_Born_2.1@1172.98,2175.02
  1-TOP w30: D2.2@1190.98,1290.02 1_OUT_2.2
  1-TOP w150: 1_Born_2.1@1164,2118 1164,1868 1_OUT_2.2@1193.98,1838.02
  other v1: 1383.98,1612.02 1192.98,1613.02 1331.98,1613.02 1239.98,1614.02 1284.98,1614.02 1146.98,1615.02 1003.98,1616.02 1051.98,1617.02 1100.98,1617.02 1379.98,1657.02 1188.98,1658.02 1327.98,1658.02 1235.98,1659.02 1280.98,1659.02 1142.98,1660.02 999.98,1661.02 1047.98,1662.02 1096.98,1662.02 1375.98,1705.02 1184.98,1706.02 1323.98,1706.02 1231.98,1707.02 1276.98,1707.02 1138.98,1708.02 995.98,1709.02 1043.98,1710.02 1092.98,1710.02 1383.98,1752.02 1192.98,1753.02 1331.98,1753.02 1239.98,1754.02 1284.98,1754.02 1146.98,1755.02 1003.98,1756.02 1051.98,1757.02 1100.98,1757.02 1380.98,1801.02 1189.98,1802.02 1328.98,1802.02 1236.98,1803.02 1281.98,1803.02 1143.98,1804.02 1000.98,1805.02 1048.98,1806.02 1097.98,1806.02 1375.98,1850.02 1184.98,1851.02 1323.98,1851.02 1231.98,1852.02 1276.98,1852.02 1138.98,1853.02 995.98,1854.02 1043.98,1855.02 1092.98,1855.02
OUT3: 2_Born_1.1 2_OUT_1.2 D3.2 pad.2@1719.98,1741.02 | length 846.4
  1-TOP w15: 2_OUT_1.2@1732.98,1805.02 2_OUT_1.2@1732.98,1889.02
  1-TOP w30: D3.2@1722.98,1287.02 2_OUT_1.2
  1-TOP w150: 2_Born_1.1@1652,2116 1652,1896 2_OUT_1.2@1711.98,1836.02
  other v1: 1917.98,1616.02 1726.98,1617.02 1865.98,1617.02 1773.98,1618.02 1818.98,1618.02 1680.98,1619.02 1537.98,1620.02 1585.98,1621.02 1634.98,1621.02 1913.98,1661.02 1722.98,1662.02 1861.98,1662.02 1769.98,1663.02 1814.98,1663.02 1676.98,1664.02 1533.98,1665.02 1581.98,1666.02 1630.98,1666.02 1909.98,1709.02 1718.98,1710.02 1857.98,1710.02 1765.98,1711.02 1810.98,1711.02 1672.98,1712.02 1529.98,1713.02 1577.98,1714.02 1626.98,1714.02 1917.98,1756.02 1726.98,1757.02 1865.98,1757.02 1773.98,1758.02 1818.98,1758.02 1680.98,1759.02 1537.98,1760.02 1585.98,1761.02 1634.98,1761.02 1914.98,1805.02 1723.98,1806.02 1862.98,1806.02 1770.98,1807.02 1815.98,1807.02 1677.98,1808.02 1534.98,1809.02 1582.98,1810.02 1631.98,1810.02 1909.98,1854.02 1718.98,1855.02 1857.98,1855.02 1765.98,1856.02 1810.98,1856.02 1672.98,1857.02 1529.98,1858.02 1577.98,1859.02 1626.98,1859.02
OUT4: 2_Born_2.1 2_OUT_2.2 D4.2 pad.2@2199.98,1744.02 | length 866.3
  1-TOP w15: 2_OUT_2.2@2207.98,1809.02 2_OUT_2.2@2207.98,1893.02
  1-TOP w30: D4.2@2199.98,1280.02 2_OUT_2.2
  1-TOP w100: 2_OUT_2.2@2138.98,1882.02 2_OUT_2.2@2195.98,1882.02
  1-TOP w150: 2_OUT_2.2@2138.98,1882.02 2148,1873 2_Born_2.1@2148,2121
  other v1: 2395.98,1612.02 2204.98,1613.02 2343.98,1613.02 2251.98,1614.02 2296.98,1614.02 2158.98,1615.02 2015.98,1616.02 2063.98,1617.02 2112.98,1617.02 2391.98,1657.02 2200.98,1658.02 2339.98,1658.02 2247.98,1659.02 2292.98,1659.02 2154.98,1660.02 2011.98,1661.02 2059.98,1662.02 2108.98,1662.02 2387.98,1705.02 2196.98,1706.02 2335.98,1706.02 2243.98,1707.02 2288.98,1707.02 2150.98,1708.02 2007.98,1709.02 2055.98,1710.02 2104.98,1710.02 2395.98,1752.02 2204.98,1753.02 2343.98,1753.02 2251.98,1754.02 2296.98,1754.02 2158.98,1755.02 2015.98,1756.02 2063.98,1757.02 2112.98,1757.02 2392.98,1801.02 2201.98,1802.02 2340.98,1802.02 2248.98,1803.02 2293.98,1803.02 2155.98,1804.02 2012.98,1805.02 2060.98,1806.02 2109.98,1806.02 2387.98,1850.02 2196.98,1851.02 2335.98,1851.02 2243.98,1852.02 2288.98,1852.02 2150.98,1853.02 2007.98,1854.02 2055.98,1855.02 2104.98,1855.02
OUT5: 3_Born_1.1 3_OUT_1.2 D5.2 pad.2@2202.98,565.02 | length 889.7
  1-TOP w15: 3_Born_1.1@1934.98,163.02 3_Born_1.1
  1-TOP w30: 3_OUT_1.2 D5.2@2204.98,1006.02
  1-TOP w150: 3_Born_1.1@1923,177 1923,209 2201.02,487.02 3_OUT_1.2@2220.98,487.02
  other v1: 2395.98,431.02 2204.98,432.02 2343.98,432.02 2251.98,433.02 2296.98,433.02 2158.98,434.02 2015.98,435.02 2063.98,436.02 2112.98,436.02 2391.98,476.02 2200.98,477.02 2339.98,477.02 2247.98,478.02 2292.98,478.02 2154.98,479.02 2011.98,480.02 2059.98,481.02 2108.98,481.02 2387.98,524.02 2196.98,525.02 2335.98,525.02 2243.98,526.02 2288.98,526.02 2150.98,527.02 2007.98,528.02 2055.98,529.02 2104.98,529.02 2395.98,571.02 2204.98,572.02 2343.98,572.02 2251.98,573.02 2296.98,573.02 2158.98,574.02 2015.98,575.02 2063.98,576.02 2112.98,576.02 2392.98,620.02 2201.98,621.02 2340.98,621.02 2248.98,622.02 2293.98,622.02 2155.98,623.02 2012.98,624.02 2060.98,625.02 2109.98,625.02 2387.98,669.02 2196.98,670.02 2335.98,670.02 2243.98,671.02 2288.98,671.02 2150.98,672.02 2007.98,673.02 2055.98,674.02 2104.98,674.02
OUT6: 3_Born_2.1 3_OUT_2.2 D6.2 pad.2@1722.98,565.02 | length 938.5
  1-TOP w15: 3_OUT_2.2@1735.98,624.02 3_OUT_2.2@1735.98,708.02
  1-TOP w30: 3_OUT_2.2 D6.2@1724.98,988.02
  1-TOP w150: 3_Born_2.1@1442,160 1442,212 3_OUT_2.2@1709.98,479.98
  other v1: 1917.98,440.02 1726.98,441.02 1865.98,441.02 1773.98,442.02 1818.98,442.02 1680.98,443.02 1537.98,444.02 1585.98,445.02 1634.98,445.02 1913.98,485.02 1722.98,486.02 1861.98,486.02 1769.98,487.02 1814.98,487.02 1676.98,488.02 1533.98,489.02 1581.98,490.02 1630.98,490.02 1909.98,533.02 1718.98,534.02 1857.98,534.02 1765.98,535.02 1810.98,535.02 1672.98,536.02 1529.98,537.02 1577.98,538.02 1626.98,538.02 1917.98,580.02 1726.98,581.02 1865.98,581.02 1773.98,582.02 1818.98,582.02 1680.98,583.02 1537.98,584.02 1585.98,585.02 1634.98,585.02 1914.98,629.02 1723.98,630.02 1862.98,630.02 1770.98,631.02 1815.98,631.02 1677.98,632.02 1534.98,633.02 1582.98,634.02 1631.98,634.02 1909.98,678.02 1718.98,679.02 1857.98,679.02 1765.98,680.02 1810.98,680.02 1672.98,681.02 1529.98,682.02 1577.98,683.02 1626.98,683.02
OUT7: 4_Born_1.1 4_OUT_1.2 D7.2 pad.2@1202.98,565.02 | length 1025.3
  1-TOP w15: 4_OUT_1.2@1206.98,621.02 4_OUT_1.2@1206.98,705.02
  1-TOP w30: 4_OUT_1.2 D7.2@1201.98,996.02
  1-TOP w150: 4_Born_1.1@932,189 1220.98,477.98 4_OUT_1.2@1220.98,580.02
  other v1: 1387.98,431.02 1196.98,432.02 1335.98,432.02 1243.98,433.02 1288.98,433.02 1150.98,434.02 1007.98,435.02 1055.98,436.02 1104.98,436.02 1383.98,476.02 1192.98,477.02 1331.98,477.02 1239.98,478.02 1284.98,478.02 1146.98,479.02 1003.98,480.02 1051.98,481.02 1100.98,481.02 1379.98,524.02 1188.98,525.02 1327.98,525.02 1235.98,526.02 1280.98,526.02 1142.98,527.02 999.98,528.02 1047.98,529.02 1096.98,529.02 1387.98,571.02 1196.98,572.02 1335.98,572.02 1243.98,573.02 1288.98,573.02 1150.98,574.02 1007.98,575.02 1055.98,576.02 1104.98,576.02 1384.98,620.02 1193.98,621.02 1332.98,621.02 1240.98,622.02 1285.98,622.02 1147.98,623.02 1004.98,624.02 1052.98,625.02 1101.98,625.02 1379.98,669.02 1188.98,670.02 1327.98,670.02 1235.98,671.02 1280.98,671.02 1142.98,672.02 999.98,673.02 1047.98,674.02 1096.98,674.02
OUT8: 4_Born_2.1 4_OUT_2.2 D8.2 pad.2@730.98,567.02 | length 1014.4
  1-TOP w15: 4_OUT_2.2@738.98,628.02 4_OUT_2.2@738.98,712.02
  1-TOP w30: 4_Born_2.1@427.98,132.02 4_Born_2.1@455.98,132.02 ; 4_OUT_2.2 D8.2@730.98,985.02
  1-TOP w150: 4_Born_2.1@456,180 456,230 725.98,499.98 4_OUT_2.2@725.98,552.02
  other v1: 919.98,435.02 728.98,436.02 867.98,436.02 775.98,437.02 820.98,437.02 682.98,438.02 539.98,439.02 587.98,440.02 636.98,440.02 915.98,480.02 724.98,481.02 863.98,481.02 771.98,482.02 816.98,482.02 678.98,483.02 535.98,484.02 583.98,485.02 632.98,485.02 911.98,528.02 720.98,529.02 859.98,529.02 767.98,530.02 812.98,530.02 674.98,531.02 531.98,532.02 579.98,533.02 628.98,533.02 919.98,575.02 728.98,576.02 867.98,576.02 775.98,577.02 820.98,577.02 682.98,578.02 539.98,579.02 587.98,580.02 636.98,580.02 916.98,624.02 725.98,625.02 864.98,625.02 772.98,626.02 817.98,626.02 679.98,627.02 536.98,628.02 584.98,629.02 633.98,629.02 911.98,673.02 720.98,674.02 859.98,674.02 767.98,675.02 812.98,675.02 674.98,676.02 531.98,677.02 579.98,678.02 628.98,678.02

## Polygon pours and split planes (outlines as drawn)
GND on 3-GND "3-GND" (solid, pour order 6): -4.21,2307.59 0.79,2312.59 2602.79,2312.59 2602.79,2.59 2597.79,-2.41 2592.79,-7.41 -8.21,-7.41
GND on 1-TOP "3-TOP" (solid, pour order 8): -1.33,2302 2585.67,2302 2591.67,2296 2595.67,2292 2595.67,2 -0.33,2 -4.33,6
GND on 4-BOTTOM "4-BOTTOM" (solid, pour order 10): -10.66,2305.5 2599.34,2305.5 2604.34,2300.5 2600.34,2296.5 2600.34,-5.5 -0.66,-5.5 -5.66,-0.5
24V on 2-SIGNAL "2-24V" (solid, pour order 7): 2035,1960.02 520.98,1960.02 495.98,1909.02 124.98,1602.02 124.98,894.02 464.98,554.02 461.98,551.02 496,450.38 591.43,343.02 2144.4,343 2233.24,171.57 2158.96,35 724.89,35 327.98,432.02 28,736 28,1768 228.98,1941.02 575.98,2288.02 2035,2288.02
GND on 2-SIGNAL "2-SIGNAL" (solid, pour order 9): -8,2323 1,2314 2598,2314 2598,8 -8,8

## Keep-outs
Keep-Out Layer:
  the board outline again, w10

## Silkscreen, mask and mechanical layers (free items; w line width, h text height)
Top Overlay:
  text "24V" at 1986,1986 h40 r180
  text "MOS1" at 666,1985 h40 r180
  text "MOS3" at 1714,1985 h40 r180
  text "MOS4" at 2230,1983 h40 r180
  text "24V" at 987,1982 h40 r180
  text "MOS2" at 1177,1982 h40 r180
  text "24V" at 1508,1980 h40 r180
  text "24V" at 503,1978 h40 r180
  text "FDP" at 61,1887 h40
  text "100n" at 899,1384 h40 r90
  text "100n" at 1915,1370 h40 r90
  text "4.7k" at 419,1261 h40
  text "4.7k" at 1398,1260 h40
  text "4.7k" at 2498,1218 h40 r270
  text "4.7k" at 1524,1044 h40 r180
  text "GND" at 262,962 h40 r270
  text "100n" at 916,827 h40 r90
  text "100n" at 1922,820 h40 r90
  text "24V" at 266,580 h40 r270
  text "MOS7" at 915,330 h40
  text "MOS8" at 478,329 h40
  text "24V" at 1672,328 h40
  text "24V" at 673,325 h40
  text "24V" at 1138,325 h40
  text "24V" at 2160,325 h40
  text "MOS5" at 1969,322 h40
  text "MOS6" at 1489,319 h40
Bottom Overlay:
  text "3" at 1514,2285 h120 r180
  text "1" at 526,2280 h120 r180
  text "4" at 2021,2277 h120 r180
  text "2" at 1021,2276 h120 r180
  text "ROBOT ESEO 2016 CARTE MOSFET (8)" at 2489.98,1667.02 h80 r90
  text "7" at 347,1631 h40
  text "5V" at 115,1630 h40
  text "1" at 343,1541 h40
  text "2" at 110,1536 h40
  text "4" at 112,1433 h40
  text "3" at 342,1431 h40
  text "10R" at 1754,1358 h40
  text "10R" at 743,1348 h40
  text "5" at 350,1342 h40
  text "6" at 113,1341 h40
  text "GND" at 110,1315 h40 r90
  text "10R" at 2158,1311 h40 r270
  text "Sujeeth S." at 2571.98,1298.02 h80 r90
  text "10R" at 1132,1294 h40 r270
  text "8" at 351,1241 h40
  text "100k" at 1624,1214 h40 r90
  text "100k" at 604,1210 h40 r90
  text "100k" at 2310,1085 h40 r270
  text "100k" at 1301,1082 h40 r270
  text "10R" at 767,946 h40 r90
  text "10R" at 1773,945 h40 r90
  text "10R" at 2185,926 h40 r180
  text "10R" at 1186,924 h40 r180
  text "GND" at 266,851 h40 r270
  text "Drivers : PM8834" at 1732,787 h40
  text "24V" at 270,469 h40 r270
  text "8" at 586,44 h120
  text "5" at 2075,42 h120
  text "6" at 1579,41 h120
  text "7" at 1084,37 h120

## Dimensions
-0.02,2322.83 to 2598.43,0.02 on Mechanical 15
-0.02,2322.83 to 2598.43,0.02 on Mechanical 15